# EAGLE board piezoboard (EAGLE 7.5.0)
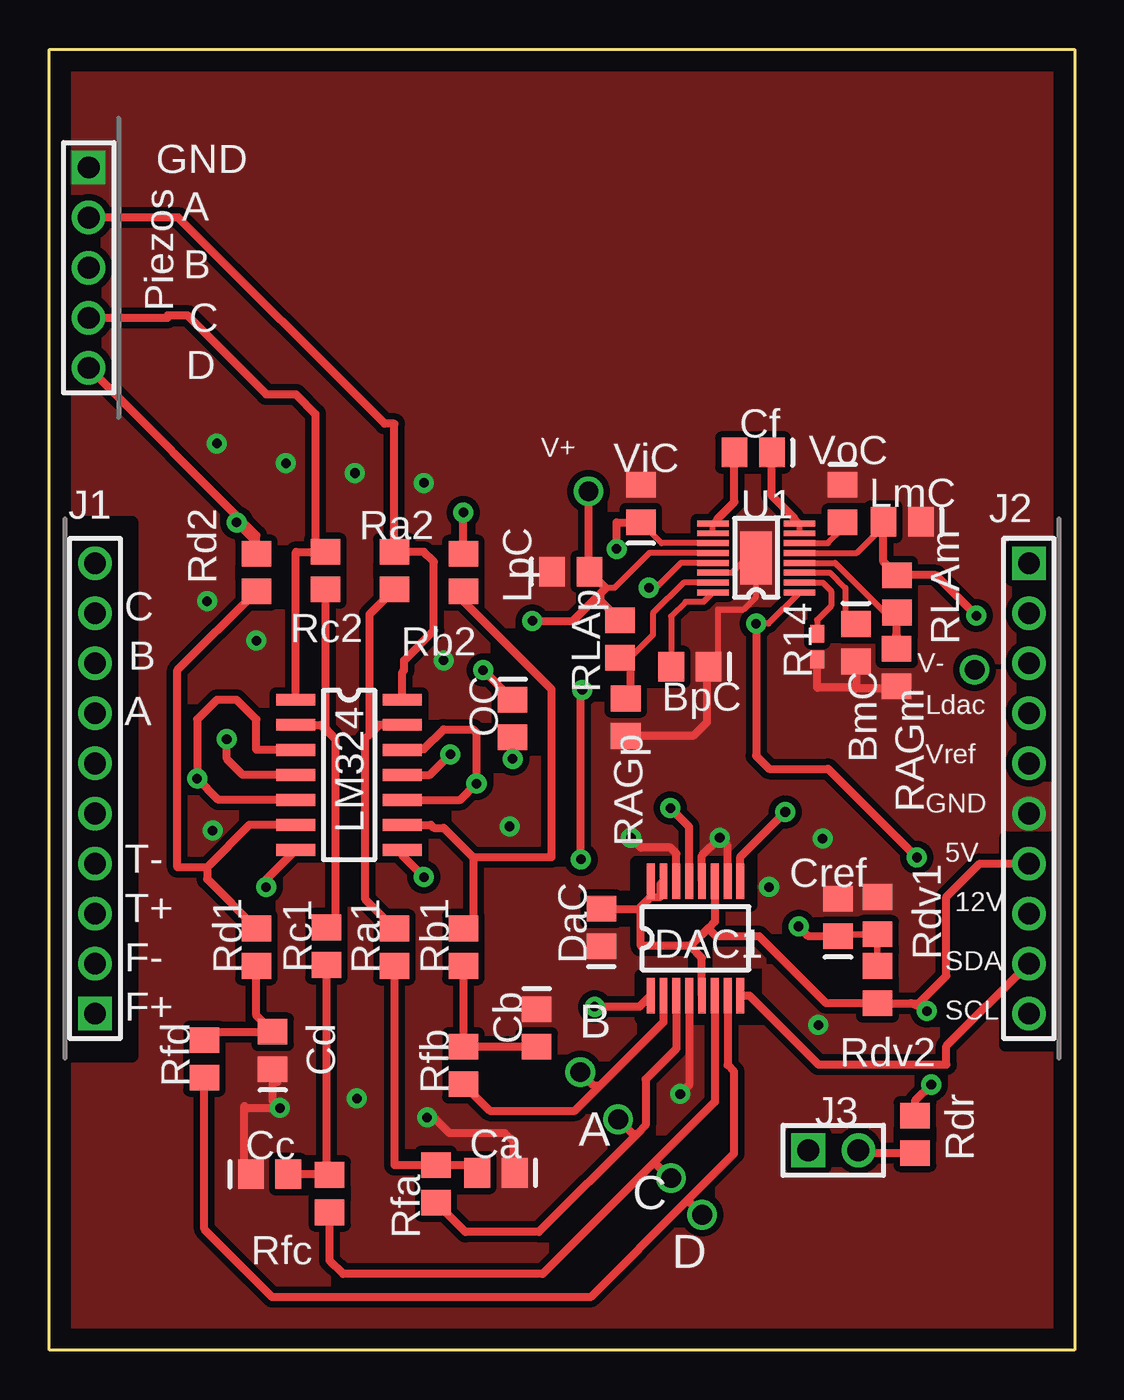
[diagram p0: board, top side]
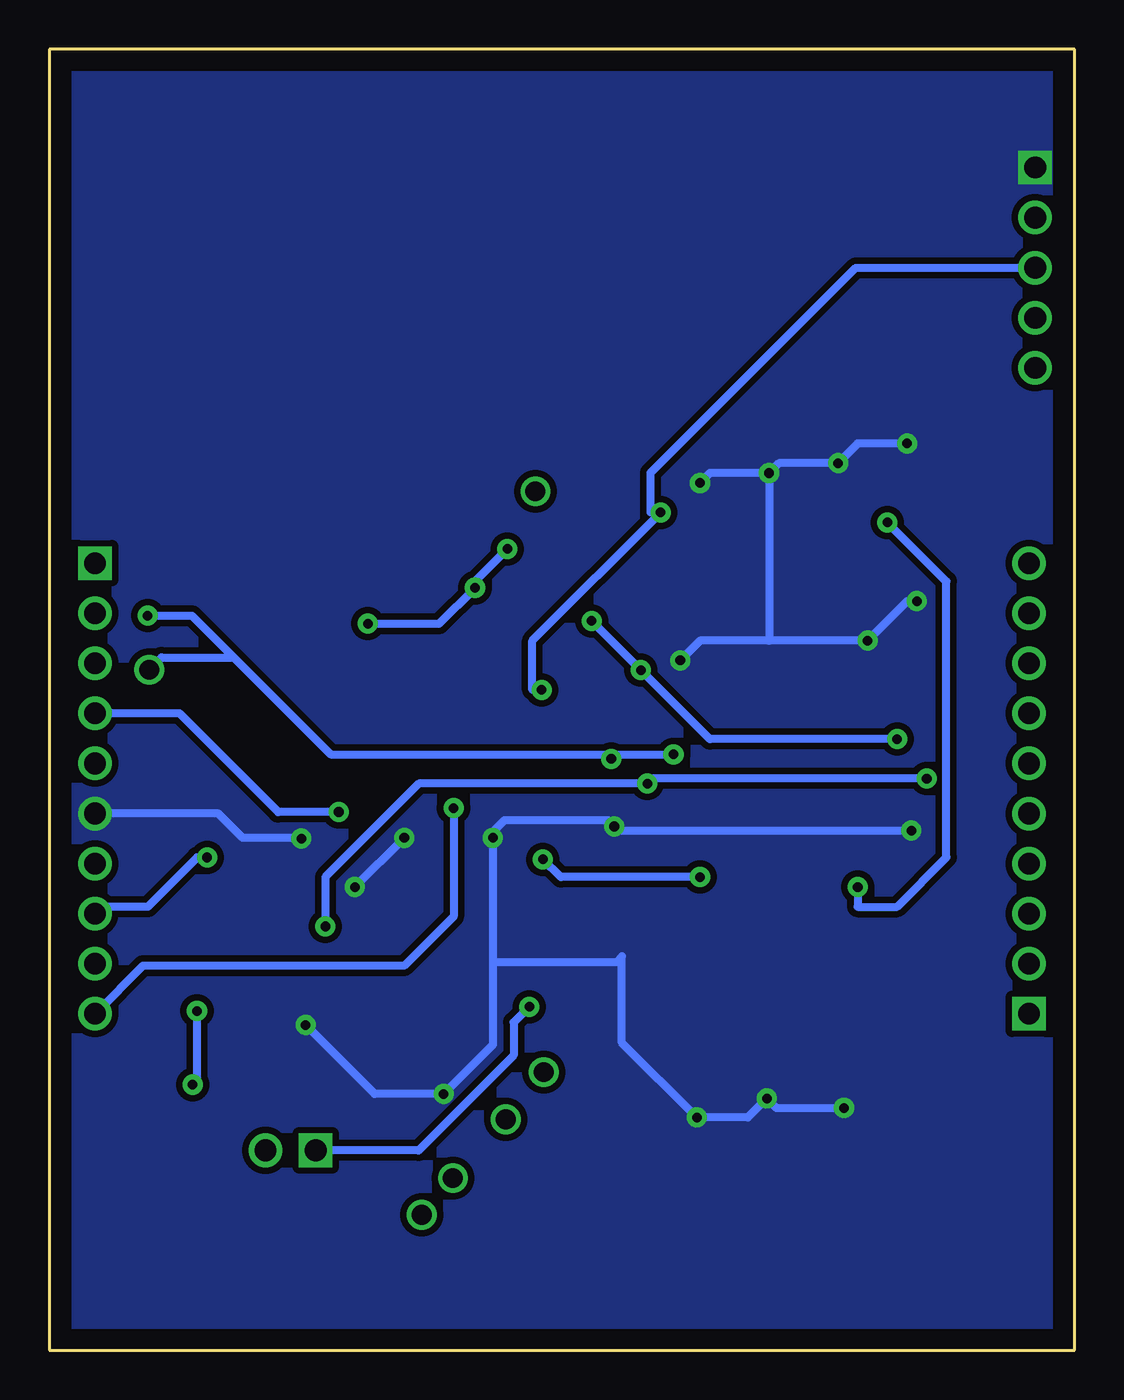
[diagram p1: board, bottom side, seen from below]

Size 52 x 66 mm. Coordinates in mm from the lower left corner, seen from the top.
Outline: 0,0 0,66 52,66 52,0 0,0
Copper layers (1*16): Top 0.035mm / dielectric 1.5mm / Bottom 0.035mm
Design rules "default *": minimum track width 10mil, minimum drill 0.61mm, track to track 8mil, track to pad 8mil, pad to pad 8mil, via to via 8mil, smd to smd 8mil, copper to edge 40mil, drill to drill 8mil, minimum pad ring 0mil, minimum via ring 8mil, stop-mask expansion 2mil, vias tented up to drill 19mil, thermal gap 10mil
Net classes: 0 Default: width 0.4 mm, clearance 0.33 mm
tRestrict: 20 lines

## Footprints (pad centres in the part's own frame; a part is rotated, then mirrored left to right if it is on the bottom)
CAP_0805 = smd 1.3 x 1.5: 1 -0.95,0; 2 0.95,0
CAP_0805_BpC = smd 1.3 x 1.5: 1 -0.95,0; 2 0.95,0
CAP_0805_Ca = smd 1.3 x 1.5: 1 -0.95,0; 2 0.95,0
CAP_0805_Cb = smd 1.3 x 1.5: 1 -0.95,0; 2 0.95,0
CAP_0805_Cd = smd 1.3 x 1.5: 1 -0.95,0; 2 0.95,0
CAP_0805_Cref = smd 1.3 x 1.5: 1 -0.95,0; 2 0.95,0
AD5696RARUZ = smd 1.8 x 0.4: 1 -2.9,2.275; 2 -2.9,1.625; 3 -2.9,0.975; 4 -2.9,0.325; 5 -2.9,-0.325; 6 -2.9,-0.975; 7 -2.9,-1.625; 8 -2.9,-2.275; 9 2.9,-2.275; 10 2.9,-1.625; 11 2.9,-0.975; 12 2.9,-0.325; 13 2.9,0.325; 14 2.9,0.975; 15 2.9,1.625; 16 2.9,2.275
HDR-1x10T/2.54/25x2 = drill 1.1 pad 1.7 square: 1 -11.43,0 | drill 1.1 pad 1.7: 2 -8.89,0; 3 -6.35,0; 4 -3.81,0; 5 -1.27,0; 6 1.27,0; 7 3.81,0; 8 6.35,0; 9 8.89,0; 10 11.43,0
HDR-1x10T/2.54/25x2_J2 = drill 1.1 pad 1.7 square: 1 -11.43,0 | drill 1.1 pad 1.7: 2 -8.89,0; 3 -6.35,0; 4 -3.81,0; 5 -1.27,0; 6 1.27,0; 7 3.81,0; 8 6.35,0; 9 8.89,0; 10 11.43,0
HDR-2x1T/2.54x2.54/3x5 = drill 1.1 pad 1.7 square: 1 0,-1.27 | drill 1.1 pad 1.7: 2 0,1.27
SOIC-14/150mil = smd 2 x 0.6: 1 -2.7,3.81; 2 -2.7,2.54; 3 -2.7,1.27; 4 -2.7,0; 5 -2.7,-1.27; 6 -2.7,-2.54; 7 -2.7,-3.81; 8 2.7,-3.81; 9 2.7,-2.54; 10 2.7,-1.27; 11 2.7,0; 12 2.7,1.27; 13 2.7,2.54; 14 2.7,3.81
CAP_0805_LpC = smd 1.3 x 1.5: 1 -0.95,0; 2 0.95,0
Pad = drill 1 pad 1.5: 1 0,0
HDR-1x5T/2.54/12x2 = drill 1.1 pad 1.7 square: 1 -5.08,0 | drill 1.1 pad 1.7: 2 -2.54,0; 3 0,0; 4 2.54,0; 5 5.08,0
RES_0402 = smd 0.9 x 0.7: 1 -0.65,0; 2 0.65,0
RES_0805 = smd 1.3 x 1.5: 1 -0.95,0; 2 0.95,0
RES_0805_Ra2 = smd 1.3 x 1.5: 1 -0.95,0; 2 0.95,0
RES_0805_RAGm = smd 1.3 x 1.5: 1 -0.95,0; 2 0.95,0
RES_0805_RAGp = smd 1.3 x 1.5: 1 -0.95,0; 2 0.95,0
RES_0805_Rb2 = smd 1.3 x 1.5: 1 -0.95,0; 2 0.95,0
RES_0805_Rc2 = smd 1.3 x 1.5: 1 -0.95,0; 2 0.95,0
RES_0805_Rd2 = smd 1.3 x 1.5: 1 -0.95,0; 2 0.95,0
RES_0805_Rdr = smd 1.3 x 1.5: 1 -0.95,0; 2 0.95,0
RES_0805_Rdv1 = smd 1.3 x 1.5: 1 -0.95,0; 2 0.95,0
RES_0805_Rdv2 = smd 1.3 x 1.5: 1 -0.95,0; 2 0.95,0
RES_0805_Rfa = smd 1.3 x 1.5: 1 -0.95,0; 2 0.95,0
RES_0805_Rfc = smd 1.3 x 1.5: 1 -0.95,0; 2 0.95,0
RES_0805_RLAp = smd 1.3 x 1.5: 1 -0.95,0; 2 0.95,0
LTC3260_MSOP = smd 1.6 x 0.3: 1 -2.2,1.75; 2 -2.2,1.25; 3 -2.2,0.75; 4 -2.2,0.25; 5 -2.2,-0.25; 6 -2.2,-0.75; 7 -2.2,-1.25; 8 -2.2,-1.75; 9 2.2,-1.75; 10 2.2,-1.25; 11 2.2,-0.75; 12 2.2,-0.25; 13 2.2,0.25; 14 2.2,0.75; 15 2.2,1.25; 16 2.2,1.75 | smd 1.6 x 2.7: 17 0,0
CAP_0805_ViC = smd 1.3 x 1.5: 1 -0.95,0; 2 0.95,0

## Placement (x,y rotation side)
BmC  10nF  [CAP_0805]  40.91,35.89 270 top
BpC  10nF  [CAP_0805_BpC]  32.49,34.67 180 top
Ca  3.2uF  [CAP_0805_Ca]  22.66,9 180 top
Cb  3.2uF  [CAP_0805_Cb]  24.71,16.35 270 top
Cc  3.2uF  [CAP_0805_BpC]  11.17,8.93 0 top
Cd  3.2uF  [CAP_0805_Cd]  11.33,15.21 90 top
Cf  1uF  [CAP_0805_Cb]  35.69,45.55 180 top
Cref  3.2uF  [CAP_0805_Cref]  40,21.95 90 top
DaC  3.2uF  [CAP_0805_BpC]  28,21.45 90 top
DAC1  AD5696RARUZ  [AD5696RARUZ]  32.77,20.9 90 top
J1  1-644456-0  [HDR-1x10T/2.54/25x2]  2.32,28.5 90 top
J2  1-644456-0  [HDR-1x10T/2.54/25x2_J2]  49.68,28.5 270 top
J3  90131-0121  [HDR-2x1T/2.54x2.54/3x5]  39.76,10.14 270 top
LM324  LM324AD  [SOIC-14/150mil]  15.2,29.19 0 top
LmC  10uF  [CAP_0805_Cb]  43.25,42.03 180 top
LpC  10uF  [CAP_0805_LpC]  26.45,39.5 0 top
OC  10uF  [CAP_0805_Cb]  23.5,32.05 270 top
Pad1  PAD  [Pad]  33.11,6.87 0 top
Pad2  PAD  [Pad]  31.54,8.73 0 top
Pad3  PAD  [Pad]  28.85,11.71 0 top
Pad4  PAD  [Pad]  26.93,14.1 0 top
Pad5  PAD  [Pad]  27.35,43.57 0 top
Pad6  PAD  [Pad]  46.93,34.52 0 top
Piezos  CON5M  [HDR-1x5T/2.54/12x2]  2,54.92 270 top
R14  200k  [RES_0402]  38.94,35.7 90 top
Ra1  5k  [RES_0805]  17.5,20.45 90 top
Ra2  30k  [RES_0805_Ra2]  17.5,39.55 90 top
RAGm  100k  [RES_0805_RAGm]  42.97,34.63 270 top
RAGp  100k  [RES_0805_RAGp]  29.24,32.11 90 top
Rb1  5k  [RES_0805]  21,20.45 90 top
Rb2  30k  [RES_0805_Rb2]  21,39.45 90 top
Rc1  5k  [RES_0805]  14.05,20.5 90 top
Rc2  30k  [RES_0805_Rc2]  14,39.55 90 top
Rd1  5k  [RES_0805]  10.5,20.45 90 top
Rd2  30k  [RES_0805_Rd2]  10.5,39.45 90 top
Rdr  10k  [RES_0805_Rdr]  43.9,10.96 90 top
Rdv1  10k  [RES_0805_Rdv1]  42,22.05 270 top
Rdv2  10k  [RES_0805_Rdv2]  42,18.55 270 top
Rfa  5k  [RES_0805_Rfa]  19.61,8.45 90 top
Rfb  5k  [RES_0805]  21,14.45 90 top
Rfc  5k  [RES_0805_Rfc]  14.22,7.95 90 top
Rfd  5k  [RES_0805]  7.86,14.79 90 top
RLAm  800k  [RES_0805_Rdv1]  42.98,38.37 270 top
RLAp  800k  [RES_0805_RLAp]  28.95,36.08 90 top
U1  LTC3260  [LTC3260_MSOP]  35.85,40.19 180 top
ViC  10uF  [CAP_0805_ViC]  30,42.95 90 top
VoC  10uF  [CAP_0805_LpC]  40.23,42.95 270 top

## Library data of the parts
BmC BpC = common; DATASHEET: http://uk.rs-online.com/web/p/ceramic-multilayer-capacitors/2644371/
Ca Cb Cc Cd LmC LpC OC ViC VoC = common; DATASHEET: http://uk.rs-online.com/web/p/ceramic-multilayer-capacitors/6911161/
Cf Cref = common; DATASHEET: http://uk.rs-online.com/web/p/ceramic-multilayer-capacitors/4515770/
DaC = common; DATASHEET: http://uk.rs-online.com/web/p/ceramic-multilayer-capacitors/2644416/
DAC1 = common; DATASHEET: http://docs-europe.electrocomponents.com/webdocs/12f9/0900766b812f9ce4.pdf
J1 J2 = common; DATASHEET: http://datasheets.diptrace.com\con_headers\ENG_CD_644456_D2.pdf; MANUFACTURER: TE Connectivity
J3 = common; DATASHEET: http://datasheets.diptrace.com\con_headers\901310126_sd.pdf; MANUFACTURER: Molex
LM324 = common; DATASHEET: http://datasheets.diptrace.com/motorola/LM224_324_2902.pdf; MANUFACTURER: Motorola
Pad1-Pad6 Piezos Ra1 Ra2 Rb1 Rb2 Rc1 Rc2 Rd1 Rd2 Rdr Rfa Rfb Rfc Rfd U1 = common
R14 = common; DATASHEET: http://uk.rs-online.com/web/p/surface-mount-fixed-resistors/3714998/
RAGm RAGp Rdv1 Rdv2 RLAm RLAp = common; DATASHEET: http://uk.rs-online.com/web/p/surface-mount-fixed-resistors/2230562/

## Nets
5V: DAC1.5 DAC1.11 DAC1.15 DAC1.16 DaC.2 J2.7 Rdr.2 Rdv2.2
Gnd: BmC.2 BpC.1 Ca.1 Cb.1 Cc.1 Cd.1 Cref.2 DAC1.4 DAC1.10 DAC1.12 DAC1.14 DaC.1 J2.6 LmC.1 LpC.1 Piezos.1 R14.1 RAGm.2 RAGp.1 Rdv1.1 U1.14 U1.17 ViC.2 VoC.1
Net_0: LM324.13 Ra1.2 Ra2.1
Net_1: LM324.4 LpC.2 OC.1 Pad5.1 RLAp.2 U1.12
Net_2: Cref.1 LM324.3 LM324.5 LM324.10 LM324.12 Rdv1.2 Rdv2.1
Net_3: DAC1.3 Pad3.1 Rfa.1
Net_4: Ca.2 Ra1.1 Rfa.2
Net_5: LM324.9 Rb1.2 Rb2.1
Net_6: LM324.8 Piezos.3 Rb2.2
Net_7: Cd.2 Rd1.1 Rfd.2
Net_8: LM324.2 Rc1.2 Rc2.1
Net_9: LM324.1 Piezos.4 Rc2.2
Net_10: DAC1.6 Pad2.1 Rfc.1
Net_11: LM324.6 Rd1.2 Rd2.1
Net_12: Cc.2 Rc1.1 Rfc.2
Net_13: DAC1.13 J2.10
Net_14: DAC1.8 J2.9
Net_15: DAC1.9 J2.4
Net_16: Cb.2 Rb1.1 Rfb.2
Net_17: Cf.1 U1.7 U1.8
Net_18: Cf.2 U1.9 U1.10
Net_19: LM324.14 Piezos.2 Ra2.2
Net_20: J2.8 U1.1 U1.11 U1.13 ViC.1
Net_21: LM324.11 LmC.2 OC.2 Pad6.1 RLAm.1 U1.5
Net_22: U1.6 VoC.2
Net_23: R14.2 U1.2
Net_24: BpC.2 U1.16
Net_25: DAC1.2 Pad4.1 Rfb.1
Net_26: BmC.1 U1.3
Net_28: RAGp.2 RLAp.1 U1.15
Net_30: RAGm.1 RLAm.2 U1.4
Net_31: LM324.7 Piezos.5 Rd2.2
Net_32: DAC1.7 Pad1.1 Rfd.1
Net_33: J3.2 Rdr.1
Net_34: DAC1.1 J3.1

## Tracks (layer width: path | path; a pad name or v marks a point on that pad's centre or on a via)
5V  (via drill 0.49 pad 1.02)
  Top 0.4: DAC1.5 33.1,19.9 32.5,20.5 | 32.5,20.5 30,20.5 30,22.5 | 30,22.5 30.5,23 | 30.5,23 31,23 31,23.65 DAC1.15 | DaC.2 29.9,22.4 30,22.5 | 30.5,23 DAC1.16 | DAC1.11 33.75,21.75 33.41,21.41 | 33.41,21.41 32.5,20.5 | 43.69,17.6 Rdv2.2 39.4,17.6 36,21 33.82,21 33.41,21.41 | 43.69,17.6 44.1,17.6 45.5,19 45.5,23 47.19,24.69 J2.7 | v44.51,17.2 43.69,17.6 | v44.73,13.48 43.9,12.65 Rdr.2
  Bottom 0.4: v44.73,13.48 44.51,13.69 v44.51,17.2
Gnd  (via drill 0.49 pad 1.02)
  Top 0.3: U1.14 34.63,39.44 35.38,40.19 U1.17 35.85,38.21 35.22,37.58 33.91,37.58 33.91,35.14 BpC.1
  Top 0.4: DAC1.4 32.45,13.45 v32,13 | DAC1.14 31.8,25.2 31.5,25.5 30,25.5 v29.5,26 | DAC1.10 34.4,25.6 v34,26 33.1,25.1 DAC1.12 | Cc.1 9.9,9.25 9.9,12.37 9.99,12.29 v11.7,12.29 11.33,12.66 Cd.1 11.33,13.84 11.57,13.6 | Ca.1 23.55,9.06 23.55,10.57 23.11,11.01 20.3,11.01 19.51,11.8 v19.16,11.8 | RAGm.2 42.86,33.57 40.91,33.57 40.91,33.62 | 40.91,33.62 38.95,33.62 38.94,33.62 R14.1 | BmC.2 40.91,33.62 | BpC.1 33.35,34.58 33.35,31.86 32.65,31.16 RAGp.1
  Bottom 0.4: 29.5,19.69 v29.5,26 29.5,26.3 28.92,26.88 23.66,26.88 v23.35,26.57 23.14,26.36 v8.28,26.36 | 29.5,19.69 29.5,15.5 v32,13 35.5,13 v39,16.5 | v36.5,23.5 v34,26 | v8.5,46 11,46 v12,45 15,45 v15.5,44.5 | v15.5,44.5 18.5,44.5 v19,44 | v8,38 8.5,38 v10.5,36 15.5,36 | 15.5,36 19,36 v20,35 | v11.7,12.29 15.12,12.29 v15.6,12.77 16.57,11.8 v19.16,11.8 22.96,15.6 22.96,19.98 23.25,19.69 29.5,19.69 | v15.5,44.5 15.5,36 | v39.22,25.96 39.25,25.99 42.19,25.99 43.43,27.23 J2.6
  pour Top (isolate 0.33, no thermals): 0.98,0.98 0.98,65.02 51.02,65.02 51.02,0.98
  pour Bottom (isolate 0.33, no thermals): 0.98,0.98 0.98,65.02 51.02,65.02 51.02,0.98
Net_0
  Top 0.4: LM324.13 16.73,31.73 16.25,31.25 | 16.25,31.25 16,31 16,22.9 Ra1.2 | 16.25,31.25 16.25,37.35 Ra2.1
Net_1  (via drill 0.49 pad 1.02)
  Top 0.3: U1.12 30.43,40.44 28.66,38.67 28.23,38.67
  Top 0.4: LM324.4 9.81,29.19 9,30 v9,31 | v24.5,37 26.55,37 27.97,38.41 | 27.97,38.41 28.23,38.67 LpC.2 27.35,39.55 Pad5.1 | v22,34.5 OC.1 | RLAp.2 27.97,38.01 27.97,38.41
  Bottom 0.4: v9,31 18.5,31 v22,34.5 | v22,34.5 v24.5,37 | v24.5,37 | v22,34.5
Net_2  (via drill 0.49 pad 1.02)
  Top 0.33: Cref.1 40.1,21.1 Rdv1.2 Rdv2.1
  Top 0.4: LM324.5 8.58,27.92 v7.5,29 7.5,32 8.5,33 9.5,33 10.5,32 10.5,30.46 LM324.3 | LM324.10 20.84,27.92 v21.66,28.74 21.66,31.34 21.5,31.5 20,31.5 19,30.5 17.94,30.5 LM324.12 | Cref.1 38.5,21 v38,21.5
  Bottom 0.4: v7.5,29 21.66,29 v21.66,28.74 33.26,28.74 38,24 v38,21.5
Net_3
  Top 0.4: DAC1.3 31.8,15.3 30.25,13.75 30.25,11.42 29.81,10.99 | 29.81,10.99 24.82,6 21.11,6 Rfa.1 | Pad3.1 29.58,10.99 29.81,10.99
Net_4
  Top 0.4: Ra1.1 17.5,9.4 Rfa.2 21.31,9.4 Ca.2
Net_5
  Top 0.4: LM324.9 19.35,26.65 19.5,26.5 20,26.5 21.5,25 | 21.5,25 21.5,21.4 Rb1.2 | Rb2.1 20.5,38.5 25.46,33.54 25.46,25 21.5,25
Net_6  (via drill 0.49 pad 1.02)
  Top 0.4: Rb2.2 v21,42.5 | LM324.8 17.9,25.1 v19,24 | v26.96,24.91 26.96,33.5 v27.03,33.5
  Bottom 0.4: v19,24 26.06,24 v26.96,24.91 | v27.03,33.5 27.5,33.5 27.5,36 v21,42.5 21.5,42.5 21.5,44.52 11.1,54.92 Piezos.3
Net_7
  Top 0.4: Rfd.2 8.28,16.16 Cd.2 10.5,16.98 Rd1.1
Net_8
  Top 0.4: LM324.2 13.77,31.73 14.5,31 | 14.5,31 14.5,21.9 Rc1.2 | Rc2.1 14,31.56 14.5,31
Net_9
  Top 0.4: LM324.1 12.5,40.5 Rc2.2 13.5,41 13.5,47.5 12.5,48.5 11,48.5 7,52.5 6,52.5 6,52.38 Piezos.4
Net_10
  Top 0.4: DAC1.6 33.75,12.59 30.69,9.53 | 30.69,9.53 25.02,3.86 14.9,3.86 14.22,4.54 Rfc.1 | 30.69,9.53 31.48,8.73 Pad2.1
Net_11
  Top 0.4: LM324.6 10.15,26.65 8,24.5 | 8,24.5 8,23.9 Rd1.2 | 8,24.5 6.5,24.5 6.5,34.5 Rd2.1
Net_12
  Top 0.4: Rc1.1 14.05,9.07 Rfc.2 14.19,8.93 Cc.2
Net_13  (via drill 0.49 pad 1.02)
  Top 0.4: DAC1.13 32.45,26.55 v31.5,27.5
  Bottom 0.4: v31.5,27.5 31.5,22 34,19.5 47.25,19.5 J2.10
Net_14
  Top 0.4: DAC1.8 35.5,18 39,14.5 45.5,14.5 45.5,15.43 J2.9
Net_15  (via drill 0.49 pad 1.02)
  Top 0.4: DAC1.9 35.05,25.04 v37.32,27.31
  Bottom 0.4: v37.32,27.31 40.39,27.31 45.4,32.31 J2.4
Net_16
  Top 0.4: Rb1.1 Rfb.2 Cb.2
Net_17
  Top 0.3: U1.7 U1.8 37.8,42.19
  Top 0.4: 37.8,42.19 36.64,43.35 Cf.1
Net_18
  Top 0.3: U1.10 U1.9 33.9,42.19
  Top 0.4: 33.9,42.19 34.74,43.04 Cf.2
Net_19
  Top 0.4: LM324.14 17.9,34.4 18,34.5 18,35 19.5,36.5 19.5,40 19,40.5 Ra2.2 17.5,47 17,47 6.54,57.46 Piezos.2
Net_20  (via drill 0.49 pad 1.02)
  Top 0.3: U1.11 31.06,40.94 ViC.1 | U1.13 32.03,39.94 30.77,38.68 v30.41,38.68 | U1.1 36.46,36.86 v35.84,36.86
  Top 0.4: v28.77,40.65 28.77,42 ViC.1 | v35.84,36.86 35.84,30.16 36.5,29.5 39.5,29.5 v44,25
  Bottom 0.4: v28.77,40.65 30.41,39.01 v30.41,38.68 32.23,36.86 v35.84,36.86 | v44,25 44.5,25 47,22.5 49.33,22.5 J2.8
Net_21  (via drill 0.49 pad 1.02)
  Top 0.3: U1.5 40.96,40.44 42.3,41.79 LmC.2
  Top 0.4: LM324.11 19.3,29.19 v20.34,30.23 | v23.5,30 OC.2 | v47.02,37.26 44.96,39.32 RLAm.1 42.3,40 LmC.2
  Bottom 0.4: v47.02,37.26 44.76,37.26 42.65,35.15 | 42.65,35.15 37.73,30.23 23.5,30.23 | 23.5,30.23 | 23.5,30.23 v20.34,30.23 | v23.5,30 23.5,30.23 | Pad6.1 46.3,35.15 42.65,35.15
Net_22
  Top 0.3: U1.6 39.49,40.94 40.23,41.69 VoC.2
Net_23
  Top 0.3: U1.2 39.23,38.94 39.65,38.52 39.65,37.76 38.94,37.05 R14.2
Net_24
  Top 0.3: U1.16 33.17,37.97 32.27,37.97 31.54,37.24 BpC.2
Net_25
  Top 0.4: Rfb.1 22.35,12.15 26.65,12.15 27.94,13.44 | 27.94,13.44 31.15,16.65 DAC1.2 | Pad4.1 27.59,13.44 27.94,13.44
Net_26
  Top 0.3: U1.3 39.6,39.44 40.37,38.68 40.37,36.84 BmC.1
Net_28
  Top 0.3: U1.15 32.16,38.94 30.61,37.39 30.61,36.29 28.95,34.62 RLAp.1
  Top 0.4: RLAp.1 29.46,34.62 29.46,33.06 RAGp.2
Net_30
  Top 0.3: U1.4 39.85,39.94 42.85,36.94 42.95,36.94
  Top 0.4: RLAm.2 42.95,37.42 42.95,36.94 42.95,36.3 42.97,36.28 RAGm.1
Net_31  (via drill 0.49 pad 1.02)
  Top 0.4: Piezos.5 10.5,41.34 Rd2.2 10.5,41 v9.5,42 | v11,23.5 11,23.88 LM324.7
  Bottom 0.4: v11,23.5 11,22.5 9,22.5 6.5,25 6.5,39 v9.5,42
Net_32
  Top 0.4: DAC1.7 | DAC1.7 34.4,14.46 34.72,14.14 34.72,9.97 32.33,7.58 | 32.33,7.58 27.45,2.69 11.3,2.69 7.86,6.14 Rfd.1 | Pad1.1 32.4,7.58 32.33,7.58
Net_33
  Top 0.4: J3.2 41.16,10.01 Rdr.1
Net_34  (via drill 0.49 pad 1.02)
  Top 0.4: DAC1.1 29.93,17.42 v27.66,17.42
  Bottom 0.4: v27.66,17.42 28.45,16.63 28.45,14.97 33.27,10.14 J3.1

## Text on the board
tPlace: GND | A | B | C | Piezos | D | V+ | Cf | ViC | VoC | J1 | U1 | LmC | J2 | Ra2 | C | Rd2 | LpC | B | Rc2 | Rb2 | V- | RLAm | R14 | A | RLAp | BpC | Ldac | OC | Vref | BmC | GND | RAGm | LM324 | T- | RAGp | 5V | T+ | Cref | 12V | F- | SDA | Rd1 | Rc1 | Ra1 | Rb1 | DaC | DAC1 | Rdv1 | F+ | B | SCL | Cb | Rdv2 | Rfd | Cd | Rfb | A | J3 | Cc | Ca | Rdr | C | Rfa | D | Rfc